# Altium PCB PCB1.PcbDoc
Units mm, origin at the board's own origin, x right, y up, seen from the top; angles counter-clockwise.
Board outline 127 x 101.6 mm, 2 copper layers (Top Layer, Bottom Layer); 18 components, 15 nets, 42 pads, 0 vias.
Unrouted connection lines stored in the file: 2.
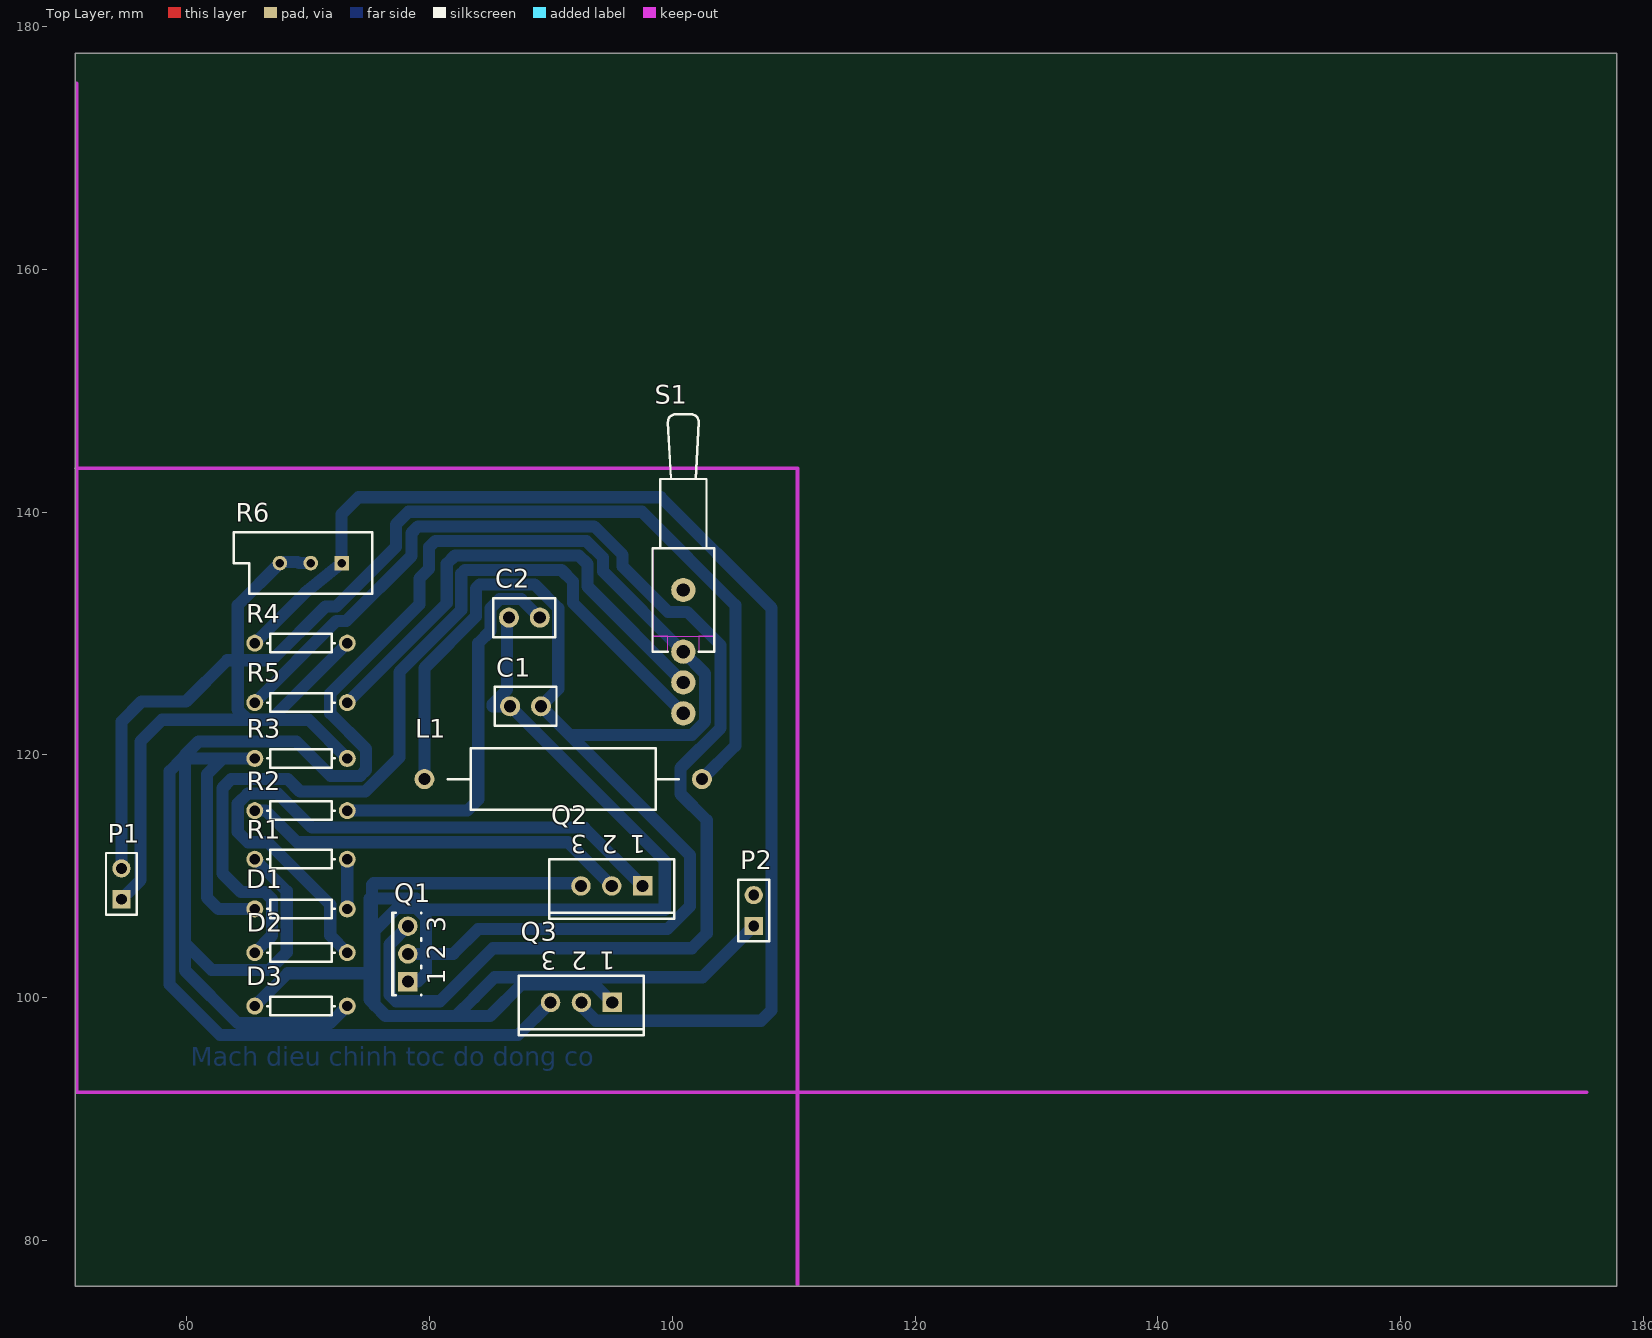
[diagram p0: Top Layer view]
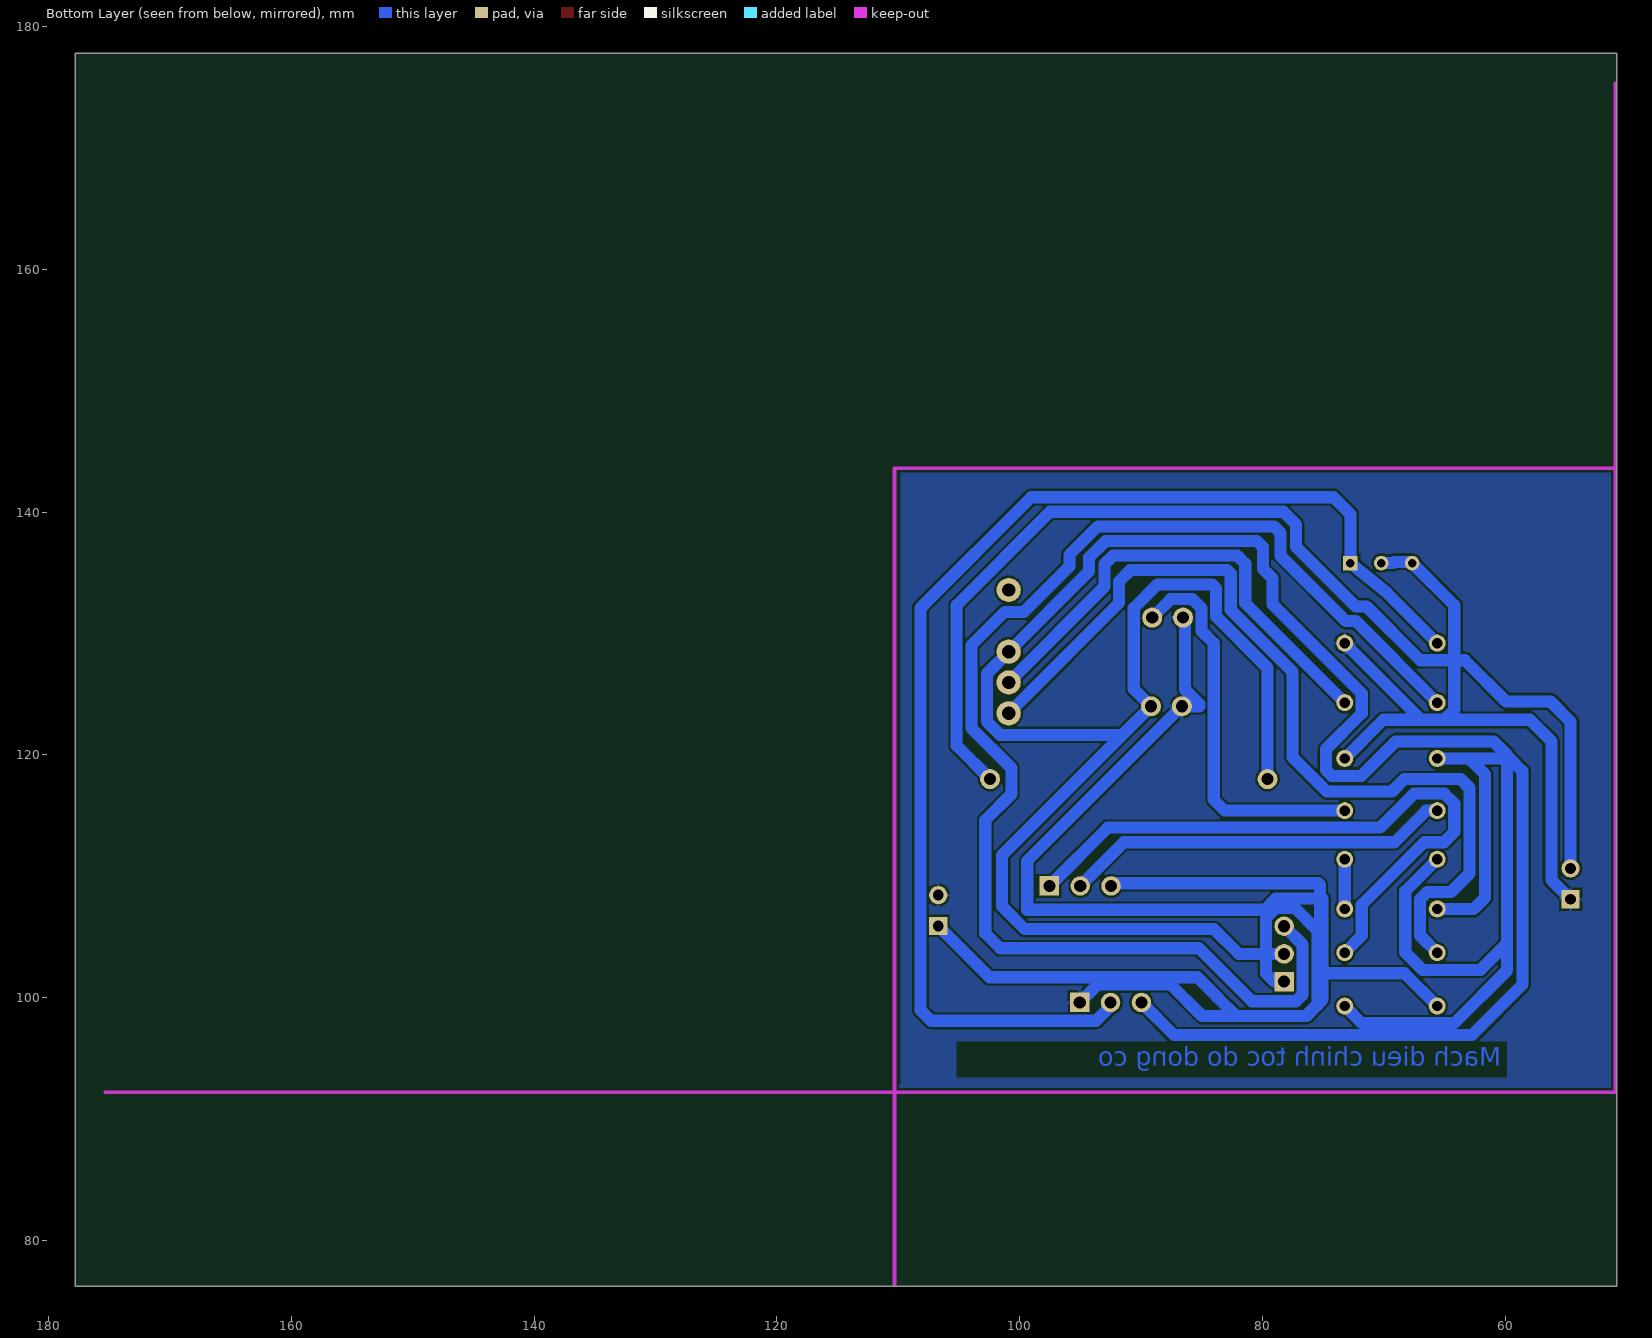
[diagram p1: Bottom Layer view, seen from below]

## Layer stack, top to bottom
Top Layer: signal copper 0.0356
Dielectric: core 0.32, FR-4, Dk 4.8
Bottom Layer: signal copper 0.0356

## Board outline
50.8,76.2 177.8,76.2 177.8,177.8 50.8,177.8

## Design rules (kind name [scope] priority, off if disabled: settings)
Clearance [All] p1: gap=0.2
PolygonConnect [All] p1: connectstyle=Relief reliefconductorwidth=0.254 reliefentries=4 polygonreliefangle="90 Angle"
RoomDefinition Sheet1 [InComponentClass('Sheet1')] p1: confinementstyle=ConfineIn formatcopy=TRUE lockcomponents=FALSE outline 76.543,145.484 175.349,145.484 175.349,174.186 76.543,174.186
RoutingLayers [All] p1: top layer_v5=FALSE bottom layer_v5=TRUE
RoutingVias [All] p1: holewidth=0.6 width=1 viastyle="Through Hole" minholewidth=0.711 minwidth=1.27 maxholewidth=0.711 maxwidth=1.27
SilkscreenOverComponentPads [All] p1: minsilkscreentomaskgap=0.254
SolderMaskExpansion [All] p1: expansion=0.102
Width [All] p1: maxlimit=1.5 minlimit=0.2 preferedwidth=1 toplayer_maxwidth=0.2 toplayer_prefwidth=0.2 bottomlayer_minwidth=0.5 minimp=50.000000 maximp=50.000000 favimp=50.000000
26 further rules are at their usual default settings.

## Components (designator, comment, footprint, x,y, rotation, side; value= is the part's Value field where it differs from the comment)
C1 "Cap" CAPR2.54-5.1x3.2 87.9,124 r0 top
C2 "Cap" CAPR2.54-5.1x3.2 87.8,131.3 r0 top
D1 "Diode" AXIAL-0.3 69.4,107.3 r180 top
D2 "Diode" AXIAL-0.3 69.4,103.7 r180 top
D3 "Diode" AXIAL-0.3 69.4,99.3 r180 top
L1 "Inductor Iron" AXIAL-0.9 91,118 r180 top
P1 "220V" HDR1X2 54.6,108.1 r90 top
P2 "DONG CO" HDR1X2 106.7,105.9 r90 top
Q1 "Triac" SFM-T3/A2.4V 78.2,103.6 r90 top
Q2 "2N3904" SFM-T3/X1.6V 95,109.2 r180 top
Q3 "2N3904" SFM-T3/X1.6V 92.5,99.6 r180 top
R1 "Res1" AXIAL-0.3 69.4,111.4 r180 top
R2 "Res1" AXIAL-0.3 69.4,115.4 r180 top
R3 "Res1" AXIAL-0.3 69.4,119.7 r180 top
R4 "Res1" AXIAL-0.3 69.4,129.2 r180 top
R5 "Res1" AXIAL-0.3 69.4,124.3 r180 top
R6 "RPot" VR5 70.2,135.8 r180 top
S1 "SW-SPDT" TL36WW15050 100.9,128.5 r90 top

## Footprints (in the part's own frame and the unit in brackets; to place one, negate y for a bottom-side part, rotate by r counter-clockwise, add the part's x,y. Pads: shape width x height; smd on the part's side, far side on the other; paste and mask are expansions set on the pad)
AXIAL-0.3 [mm] "Axial Device, Thru-Hole; 2 Leads; 0.3 in Pin Spacing"
  round 1.4 hole 0.85: 1(-3.81,0) 2(3.81,0)
  silkscreen extent -2.77,-0.76 2.77,0.76
AXIAL-0.9 [mm] "Axial Device, Thru-Hole; 2 Leads; 0.9 in Pin Spacing"
  round 1.65 hole 1: 1(-11.43,0) 2(11.43,0)
  silkscreen extent -9.53,-2.54 9.52,2.54
CAPR2.54-5.1x3.2 [mm] "Capacitor, Ceramic, Thru-Hole, Dipped Radial; Body 5.1 x 3.2 mm (WxT) Pin Spacing 2.54 mm (typ)"
  round 1.65 hole 1: 1(-1.27,0) 2(1.27,0)
  silkscreen extent -2.55,-1.6 2.55,1.6
HDR1X2 [mm] "Connector; Header; 2 Position"
  rect 1.5x1.5 hole 0.9: 1(0,0)
  round 1.5 hole 0.9: 2(2.54,0)
  silkscreen extent -1.27,-1.27 3.81,1.27
SFM-T3/A2.4V [mm] "TO, Thru-Hole, Vertical, Heatsink Mounted; 3 In-Line Leads; Pitch 2.28 mm"
  rect 1.6x1.6 hole 1: 1(-2.28,0)
  round 1.6 hole 1: 2(0,0) 3(2.28,0)
  silkscreen extent -3.4,-1.1 3.4,1.3
SFM-T3/X1.6V [mm] "TO, Thru-Hole, Vertical, Heatsink Mounted; 3 In-Line Leads; Pitch 2.54 mm"
  rect 1.6x1.6 hole 1: 1(-2.54,0)
  round 1.6 hole 1: 2(0,0) 3(2.54,0)
  silkscreen extent -5.15,-2.2 5.15,2.7
TL36WW15050 [mm] "SPDT Subminiature Toggle Switch, Right Angle Mounting, Vertical Actuation"
  round 2 hole 1.1: 1(0,0) 2(-2.54,0) 3(-5.08,0) M(5.08,0)
  Top Layer keep-out region: 0.001,-1.27 0.001,-2.54 1.271,-2.54 1.271,-1.27
  Top Layer keep-out region: 0.001,2.54 0.001,1.27 1.271,1.27 1.271,2.54
  Top Layer keep-out region: 1.271,2.54 1.271,-2.54 8.51,-2.54 8.51,2.54
  silkscreen extent 0,-2.54 19.56,2.54
VR5 [mm] "Variable Resistor, Thru-Hole; 3 Leads"
  rect 1.2x1.2 hole 0.7: 1(-2.54,0)
  round 1.2 hole 0.7: 2(0,0) 3(2.54,0)
  silkscreen extent -5.08,-2.54 6.35,2.54

## Part data
C1 C2: "Capacitor"
D1 D2 D3: "Default Diode"
L1: "Magnetic-Core Inductor"
P1 P2: library part "Header 2", "Header, 2-Pin"
Q1: "Silicon Bidirectional Triode Thyristor"
Q2 Q3: "NPN General Purpose Amplifier"
R1 R2 R3 R4 R5: "Resistor"
R6: "Potentiometer"
S1: "SPDT Subminiature Toggle Switch, Right Angle Mounting, Vertical Actuation"

## Nets (pads, with @x,y where several pads share a name; then routed paths per layer and width w, separated by ;. In a path a pad name is that pad's centre, name@x,y a point inside that pad or via, vN(x,y) a via of type N, cw(c..) or ccw(c..) an arc to the next point about the centre after c; other vN are vias at no path point)
GND: C1.1 C2.1 P1.1 P2.2 Q3.1 R4.1 | length 120.7
  Bottom Layer w1: P1.1 56.172,109.672 56.172,121.107 57.95,122.885 66.895,122.885 R4.1 ; C2.1 86.378,131.148 86.378,125.378 85.815,124.815 85.198,124.197 85.198,124 C1.1 99.364,111.266 99.364,107.239 79.807,107.239 78.892,108.153 75.032,108.153 75.032,99.847 76.403,98.476 84.963,98.476 87.587,101.1 93.54,101.1 Q3.1
NetC1_2: C1.2 D3.1 L1.2 Q1.2 R1.2 S1.1 | length 231.4
  Bottom Layer w1: R1.2 68.224,108.766 68.224,103.708 66.802,102.286 62.027,102.286 59.842,104.47 ; D3.1 71.802,97.892 64.186,97.892 59.842,102.235 59.842,104.47 ; Q1.2 81.94,103.6 83.979,105.639 99.568,105.639 101.448,107.518 101.448,111.722 91.529,121.641 ; L1.2 79.57,127.162 83.805,131.397 83.805,133.706 84.124,134.025 88.65,134.025 90.595,132.08 90.595,125.425 C1.2 91.529,121.641 ; 59.842,104.47 59.842,119.982 ; 59.842,104.47 59.842,119.982 ; 59.842,119.982 60.96,121.1 69,121.1 71.831,118.269 74.281,118.269 74.752,118.74 74.752,120.472 71.806,123.419 71.806,125.049 79.148,132.391 79.148,134.528 79.951,135.332 79.951,137.109 80.467,137.625 92.91,137.625 94.289,136.245 94.289,135.111 S1.1 102.692,126.708 102.692,122.733 101.6,121.641 91.529,121.641
NetC2_2: C2.2 R2.1 | length 32.4
  Bottom Layer w1: R2.1 83.091,115.4 83.998,116.307 83.998,129.19 85.005,130.197 85.005,132.08 85.75,132.825 87.545,132.825 C2.2
NetD1_1: D1.1 R1.1 | length 4.1
  Bottom Layer w1: D1.1 R1.1
NetD1_2: D1.2 Q3.3 R3.2 | length 78.2
  Bottom Layer w1: D1.2 62.586,107.3 61.652,108.234 61.652,118.397 62.941,119.686 ; R3.2 R3.2@65.576,119.686 ; Q3.3 87.261,96.901 62.738,96.901 58.572,101.067 58.572,118.656 59.602,119.686 62.941,119.686 ; 62.941,119.686 R3.2@65.576,119.686 ; 62.941,119.686 R3.2@65.576,119.686
NetD2_1: D2.1 Q2.1 | length 53.8
  Bottom Layer w1: D2.1 71.806,105.104 71.806,107.645 66.65,112.801 65.024,112.801 64.19,113.635 64.19,115.981 65.009,116.8 67.502,116.8 70.302,114 92.74,114 Q2.1
NetD2_2: D2.2 S1.3 | length 75
  Bottom Layer w1: D2.2 67.005,105.115 67.005,108.102 66.408,108.7 64.451,108.7 62.928,110.223 62.928,117.273 63.655,118 68.3,118 69.32,116.98 74.689,116.98 77.509,119.8 77.509,126.835 82.605,131.931 82.605,134.925 82.905,135.225 90.862,135.225 91.795,134.292 91.795,132.525 S1.3
NetD3_2: D3.2 Q2.3 | length 35.6
  Bottom Layer w1: D3.2 68.296,102.006 75.26,102.006 75.26,109.297 75.383,109.419 92.16,109.419 92.16,109.2 Q2.3
NetL1_1: L1.1 P1.2 | length 89.6
  Bottom Layer w1: P1.2 54.6,122.733 56.26,124.393 59.927,124.393 63.322,127.787 66.98,127.787 71.412,132.22 72.301,132.22 77.224,137.143 77.224,138.989 78.261,140.025 97.486,140.025 105.181,132.329 105.181,120.751 L1.1
NetP2_1: P2.1 Q1.1 | length 52.5
  Bottom Layer w1: Q1.1 79.019,101.32 79.705,102.006 79.705,106.528 78.842,107.391 77.335,107.391 75.463,105.52 75.463,99.357 76.344,98.476 82.169,98.476 83.668,99.974 83.668,100 85.344,101.676 102.476,101.676 P2.1
NetQ1_3: Q1.3 R5.2 | length 111.1
  Bottom Layer w1: R5.2 72.31,131.02 73.125,131.02 78.495,136.39 78.495,138.283 79.037,138.825 93.548,138.825 95.895,136.477 95.895,135.525 99.639,131.781 101.213,131.781 103.972,129.022 103.972,122.209 100.673,118.91 100.673,116.764 102.832,114.605 102.832,105.292 101.6,104.06 85.216,104.06 80.852,99.695 77.216,99.695 76.683,100.228 76.683,104.363 Q1.3
NetQ2_2: Q2.2 R2.2 | length 32
  Bottom Layer w1: R2.2 66.499,115.4 69.099,112.8 91.4,112.8 Q2.2
NetQ3_2: Q3.2 R4.2 R6.1 | length 103.5
  Bottom Layer w1: R4.2 69.74,133.35 R6.1 72.74,139.821 74.144,141.225 99.034,141.225 108.153,132.105 108.153,98.958 107.29,98.095 93.694,98.095 92.5,99.289 Q3.2
NetR3_1: R3.1 R6.2 R6.3 | length 26.8
  Bottom Layer w1: R6.2 69.22,135.8 69.12,135.9 67.76,135.9 R6.3 64.186,132.326 64.186,123.723 65.024,122.885 70.025,122.885 R3.1
NetR5_1: R5.1 S1.2 | length 40
  Bottom Layer w1: R5.1 81.405,132.495 81.405,135.738 82.092,136.425 92.286,136.425 92.995,135.716 92.995,133.865 S1.2
pads on no net: S1.M

## Polygon pours and split planes (outlines as drawn)
GND on Bottom Layer "Bottom Layer-No Net" (solid, pour order 1000): 50.7,143.4 51.2,142.9 51.2,92.4 109.7,92.4 110,92.7 109.8,92.9 109.8,143.4

## Keep-outs
Keep-Out Layer:
  lines w0.3: 50.9,143.6 65.75,143.6 95.45,143.6 110.3,143.6 110.3,76.327 ; 50.927,175.327 50.927,92.2 175.327,92.2

## Other copper
Bottom Layer:
  text "Mach dieu chinh toc do dong co" at 60.3,94.4 h1.52

## Silkscreen, mask and mechanical layers (free items; w line width, h text height)
Drill Drawing:
  text ".LEGEND" at 182.88,81.28 h1.52
  text "Drill Drawing." at 182.88,78.74 h1.52

## Dimensions
50.927,92.2 to 50.927,175.327 on Mechanical 1
50.927,92.2 to 175.327,92.2 on Mechanical 1

## Text inside footprints (layer, text, board x,y; h text height)
Q1: Top Overlay "1" at 81.275,101.07 h1.5 r90; Top Overlay "2" at 81.275,103.1 h1.5 r90; Top Overlay "3" at 81.275,105.38 h1.5 r90
Q2: Top Overlay "1" at 97.79,113.375 h1.5 r180; Top Overlay "2" at 95.5,113.375 h1.5 r180; Top Overlay "3" at 92.96,113.375 h1.5 r180
Q3: Top Overlay "1" at 95.29,103.775 h1.5 r180; Top Overlay "2" at 93,103.775 h1.5 r180; Top Overlay "3" at 90.46,103.775 h1.5 r180